# Altium PCB 2101 Version.PcbDoc
Units mil, origin at the board's own origin, x right, y up, seen from the top; angles counter-clockwise.
Board outline 2960 x 1860 mil, 2 copper layers (Top Layer, Bottom Layer); 50 components, 29 nets, 118 pads, 0 vias.
Unrouted connection lines stored in the file: 95.
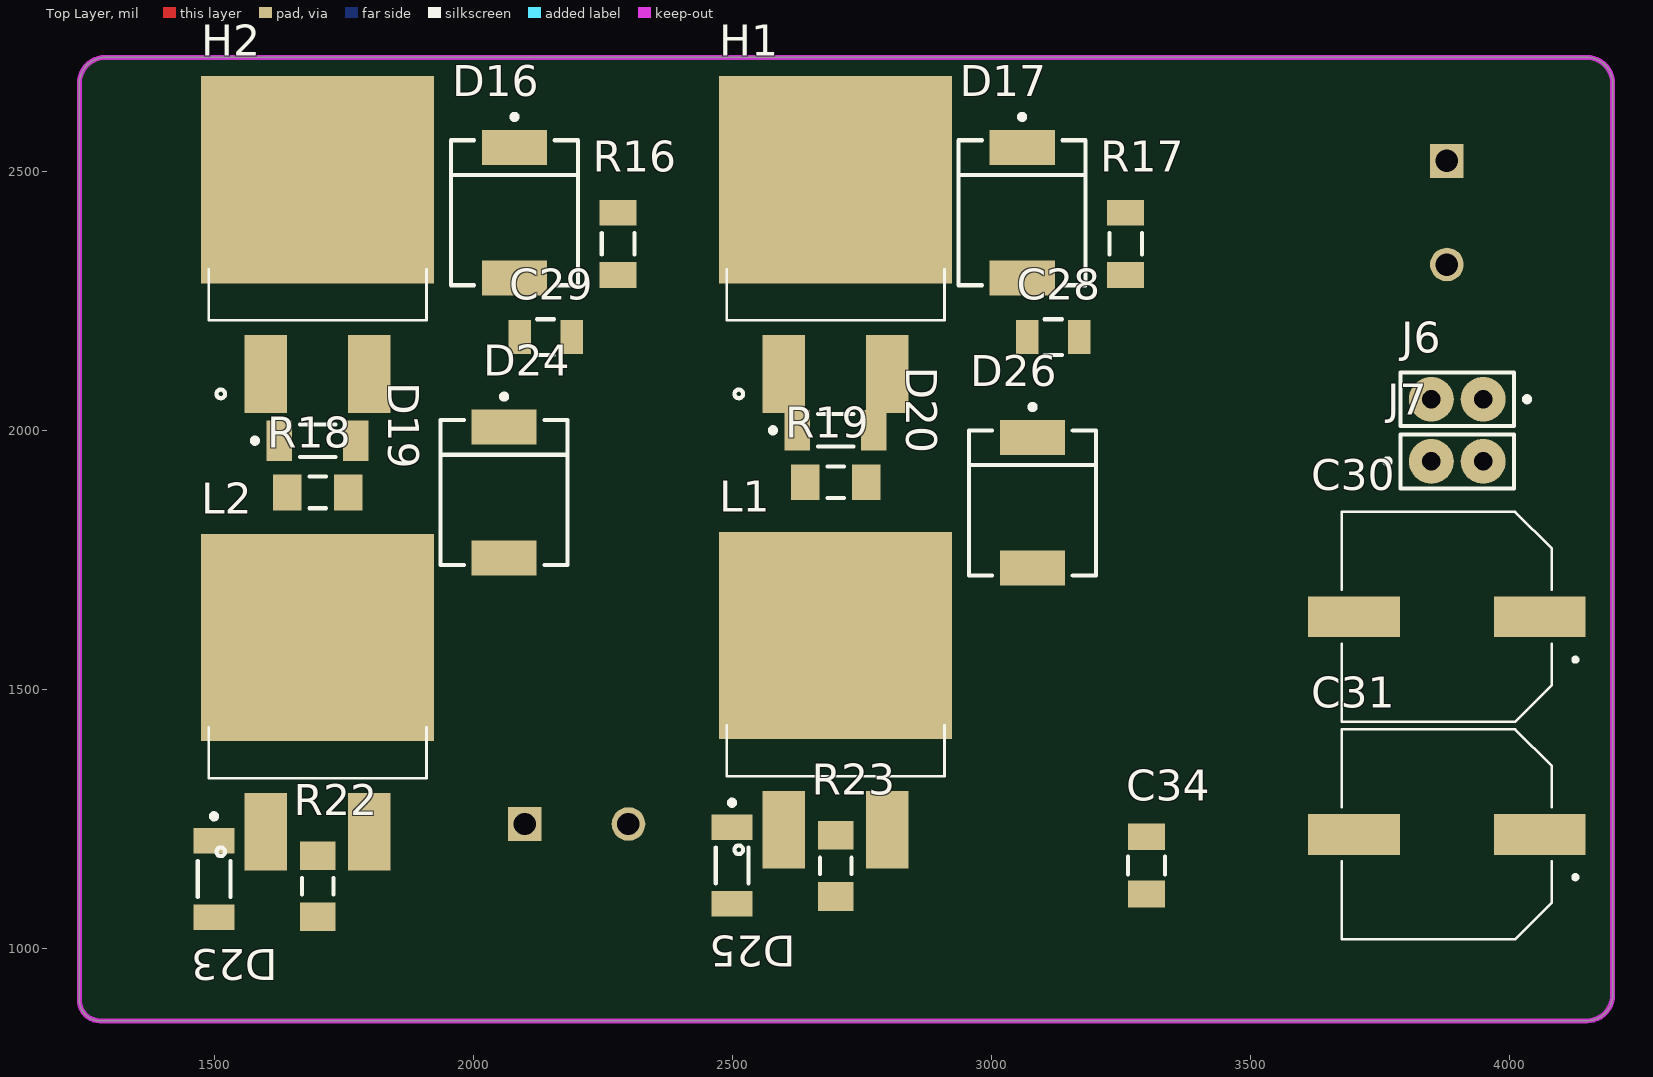
[diagram p0: Top Layer view]
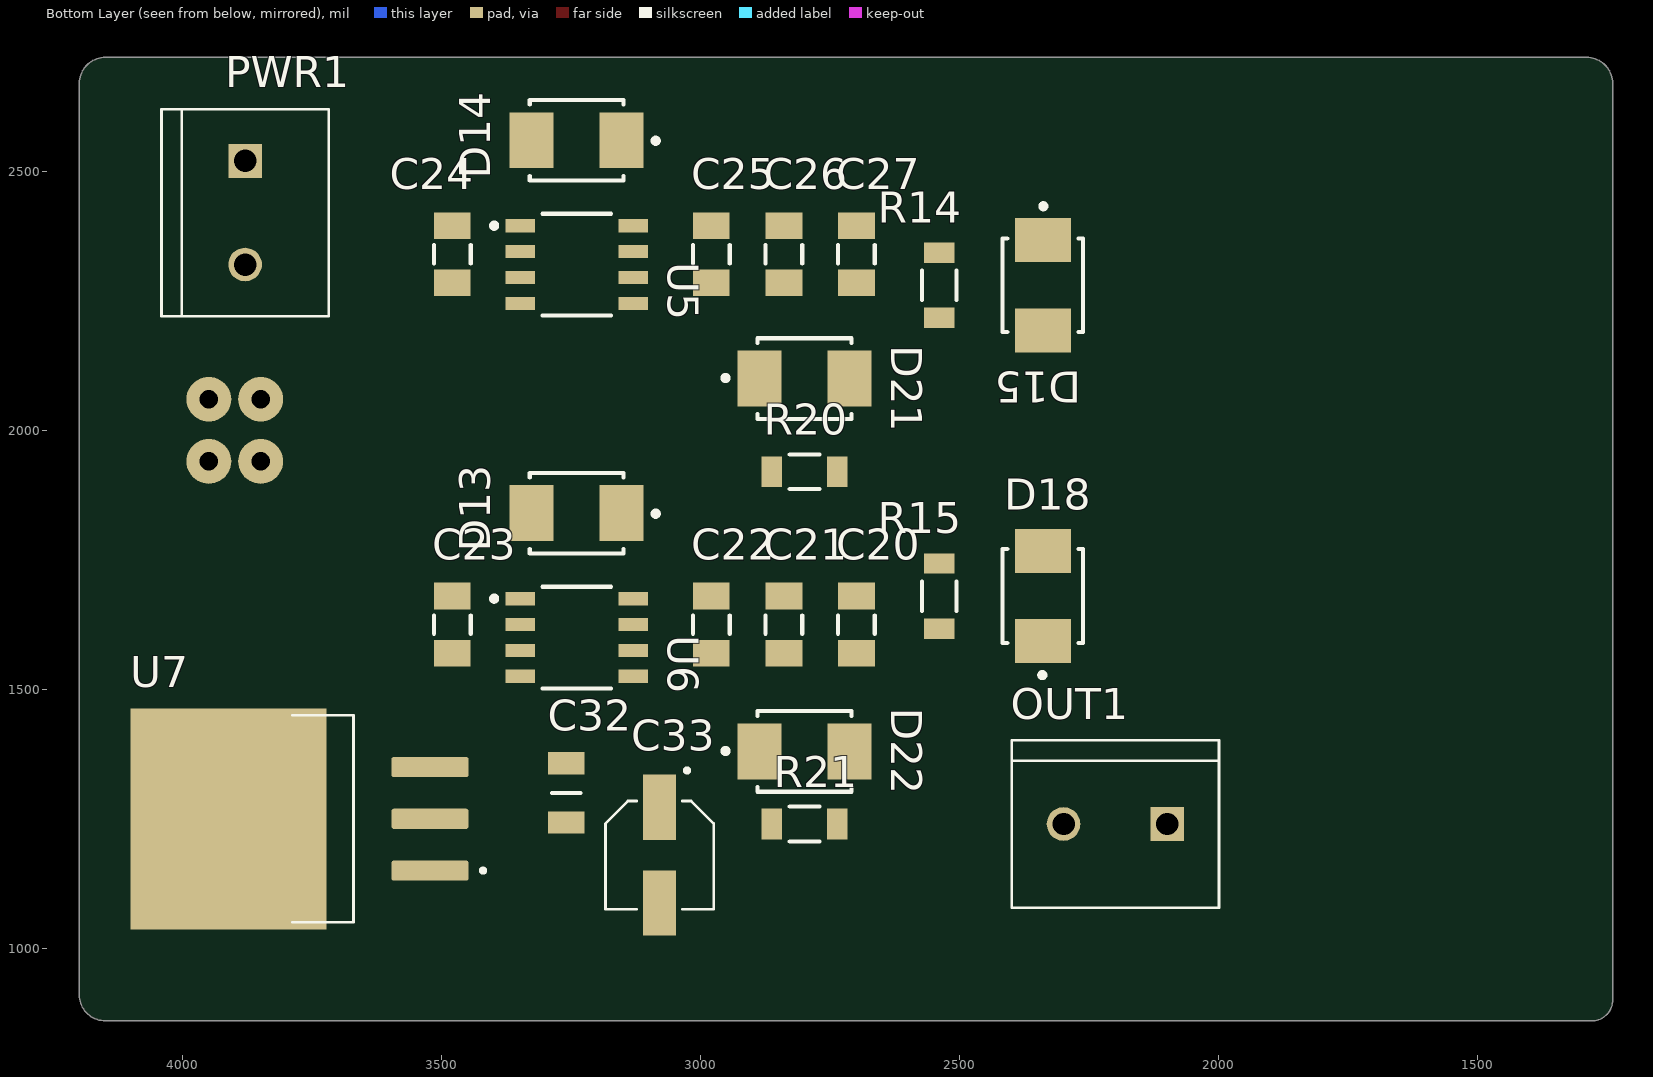
[diagram p1: Bottom Layer view, seen from below]

## Layer stack, top to bottom
Top Solder: solder mask 0.4, Solder Resist, Dk 3.5
Top Layer: signal copper 1.4
Dielectric 1: dielectric 12.6, FR-4, Dk 4.8
Bottom Layer: signal copper 1.4
Bottom Solder: solder mask 0.4, Solder Resist, Dk 3.5

## Board outline
1240,900 ccw(c1280,900) 1280,860 4150,860 ccw(c4150,910) 4200,910 4200,2670 ccw(c4150,2670) 4150,2720 1290,2720 ccw(c1290,2670) 1240,2670

## Design rules (kind name [scope] priority, off if disabled: settings)
Clearance [All] p1: gap=19 ignorepadtopadclearanceinfootprint=TRUE except(0: Arc-Hole Track-Hole SMDPad-Hole THPad-Hole Via-Hole Fill-Hole Poly-Hole Region-Hole Text-Hole)
ComponentClearance [All] p1: gap=10 collisioncheckmode=3 verticalgap=0 showdistances=FALSE
PolygonConnect [All] p1: connectstyle=Direct reliefconductorwidth=10 reliefentries=4 polygonreliefangle="90 Angle" airgapwidth=10
RoutingVias [All] p1: holewidth=28 width=50 viastyle="Through Hole" minholewidth=28 minwidth=50 maxholewidth=28 maxwidth=50
SolderMaskExpansion [All] p1: expansion=4 istentingtop=FALSE
Width [All] p1: maxlimit=200 minlimit=10 preferedwidth=20 minimp=50.000000 maximp=50.000000 favimp=50.000000
29 further rules are at their usual default settings.

## Components (designator, comment, footprint, x,y, rotation, side; value= is the part's Value field where it differs from the comment)
C20 "12061C474KAT2A" FP-1206-L_3_2_0_2-W_1_6_0-IPC_B 2700,1625 r270 bottom
C21 "12061C474KAT2A" FP-1206-L_3_2_0_2-W_1_6_0-IPC_B 2840,1625 r270 bottom
C22 "12061C474KAT2A" FP-1206-L_3_2_0_2-W_1_6_0-IPC_B 2980,1625 r270 bottom
C23 "12065C104KAT2A" FP-1206-L_3_2_0_2-W_1_6_0-IPC_B 3480,1625 r270 bottom
C24 "12065C104KAT2A" FP-1206-L_3_2_0_2-W_1_6_0-IPC_B 3480,2340 r270 bottom
C25 "12061C474KAT2A" FP-1206-L_3_2_0_2-W_1_6_0-IPC_B 2980,2340 r270 bottom
C26 "12061C474KAT2A" FP-1206-L_3_2_0_2-W_1_6_0-IPC_B 2840,2340 r270 bottom
C27 "12061C474KAT2A" FP-1206-L_3_2_0_2-W_1_6_0-IPC_B 2700,2340 r270 bottom
C28 "CL31C331JBCNNNC" FP-CL31-IPC_C 3120,2180 r180 top
C29 "CL31C331JBCNNNC" FP-CL31-IPC_C 2140,2180 r180 top
C30 "220uF" 220uF 3880,1640 r180 top
C31 "220uF" 220uF 3880,1220 r180 top
C32 "330nF" "1206 PACKAGE" 3260,1300 r90 bottom
C33 "22uF" 22uF-50V_CAP_EEEFN1H220UR 3080,1180 r270 bottom
C34 "12065C104KAT2A" FP-1206-L_3_2_0_2-W_1_6_0-IPC_B 3300,1160 r90 top
D13 "MURS120T3G" FP-403A-03-MFG 3240,1840 r0 bottom
D14 "MURS120T3G" FP-403A-03-MFG 3240,2560 r0 bottom
D15 "MURS120T3G" FP-403A-03-MFG 2340,2280 r270 bottom
D16 "SS34-E3/57T" FP-95402-MFG 2080,2420 r270 top
D17 "SS34-E3/57T" FP-95402-MFG 3060,2420 r270 top
D18 "MURS120T3G" FP-403A-03-MFG 2340,1680 r90 bottom
D19 "TZMC3V3-GS08" FP-6_560-5005_01-4-MFG 1700,1980 r0 top
D20 "TZMC3V3-GS08" FP-6_560-5005_01-4-MFG 2700,2000 r0 top
D21 "MURS120T3G" FP-403A-03-MFG 2800,2100 r180 bottom
D22 "MURS120T3G" FP-403A-03-MFG 2800,1380 r180 bottom
D23 "TZMC3V3-GS08" FP-6_560-5005_01-4-MFG 1500,1133.82 r270 top
D24 "SS34-E3/57T" FP-95402-MFG 2060,1880 r270 top
D25 "TZMC3V3-GS08" FP-6_560-5005_01-4-MFG 2500,1160 r270 top
D26 "SS34-E3/57T" FP-95402-MFG 3080,1860 r270 top
H1 "IRF3205S_PBF" 3205pbf 2700,2340 r0 top
H2 "IRF3205S_PBF" 3205pbf 1700,2340 r0 top
J6 "M20-9990246" FP-M20-9990246-MFG 3900,2060 r180 top
J7 "M20-9990246" FP-M20-9990246-MFG 3900,1940 r0 top
L1 "IRF3205S_PBF" 3205pbf 2700,1460 r0 top
L2 "IRF3205S_PBF" 3205pbf 1700,1456.1 r0 top
OUT1 "2_pin_male_header" 2_pin_male_header 2200,1240 r0 bottom
PWR1 "2_pin_male_header" 2_pin_male_header 3880,2420 r270 bottom
R14 "RC1206JR-0710RL" FP-RC1206-0_65-MFG 2540,2280 r270 bottom
R15 "RC1206JR-0710RL" FP-RC1206-0_65-MFG 2540,1680 r90 bottom
R16 "AC1206FR-0720RL" FP-AC1206-IPC_A 2280,2360 r270 top
R17 "AC1206FR-0720RL" FP-AC1206-IPC_A 3260,2360 r270 top
R18 "Resistor 1k +/-1% 1206 250 mW" RESC3116X70X50ML13T20 1700,1880 r0 top value=1k
R19 "Resistor 1k +/-1% 1206 250 mW" RESC3116X70X50ML13T20 2700,1900 r0 top value=1k
R20 "RC1206JR-0710RL" FP-RC1206-0_65-MFG 2800,1920 r180 bottom
R21 "RC1206JR-0710RL" FP-RC1206-0_65-MFG 2800,1240 r180 bottom
R22 "Resistor 1k +/-1% 1206 250 mW" RESC3116X70X50ML13T20 1700,1120 r270 top value=1k
R23 "Resistor 1k +/-1% 1206 250 mW" RESC3116X70X50ML13T20 2700,1159.06 r270 top value=1k
U5 "IR2101SPBF-BL" FP-PG-DSO-8-MFG 3240,2320 r180 bottom
U6 "IR2101SPBF-BL" FP-PG-DSO-8-MFG 3240,1600 r180 bottom
U7 "LM7812S/NOPB" lm7812 3800,1260 r90 bottom

## Footprints (in the part's own frame and the unit in brackets; to place one, negate y for a bottom-side part, rotate by r counter-clockwise, add the part's x,y. Pads: shape width x height; smd on the part's side, far side on the other; paste and mask are expansions set on the pad)
2_pin_male_header [mm] "TE_282837-2"
  rect 1.65x1.65 hole 1.1: 1(-2.54,0)
  round 1.65 hole 1.1: 2(2.54,0)
  silkscreen extent -5.08,-4.1 5.08,4.1, body extent -5.38,-4.14 5.38,4.06, height 9.79
22uF-50V_CAP_EEEFN1H220UR [mm] "22uF 50V electrolytic smd kondansator"
  rect 3.2x1.6 smd: 1(-2.35,0) 2(2.35,0)
  silkscreen extent -4.25,-2.65 2.65,2.65, body extent -3,-2.65 3,2.65, height 5.8
220uF [mm] "220uF_50V_smd_capacitor"
  rect 4.5x2 smd: 1(-4.55,0) 2(4.55,0)
  silkscreen extent -6.4,-5.15 5.15,5.15, body extent -5.85,-5.15 5.85,5.15, height 10.19
"1206 PACKAGE" [mm] "PACKAGE FOR RESISTOR AND CAPACITOR"
  rect 1.1x1.8 smd: 1(-1.45,0) 2(1.45,0)
  silkscreen extent 0,-0.7 0,0.7, body extent -1.42,-0.8 1.68,0.8, height 0.65
3205pbf [mm]
  rect 2.08x3.81 smd: 1(-2.54,-5.87) 3(2.54,-5.87)
  rect 11.43x10.16 smd: 2(0,3.655)
  silkscreen extent -5.34,-7.06 5.34,-0.74, body extent -5.08,-6.62 5.08,8.62, height 4.83
FP-6_560-5005_01-4-MFG [mm]
  rect 1.25x2 smd paste+0 mask+0: 1(-1.875,0) 2(1.875,0)
  silkscreen extent -3.2,-0.8 0.87,0.8, body extent -1.76,-0.8 1.74,0.8, height 1.59
FP-403A-03-MFG [mil]
  rect 85x107.99 smd paste+0 mask+0: 1(-87.01,0) 2(87.01,0)
  silkscreen extent -157,-78 91,78, body extent -107,-70 107,70, height 97
FP-1206-L_3_2_0_2-W_1_6_0-IPC_B [mil]
  rect 51.36x71.11 smd paste+0 mask+0: 1(-55.15,0) 2(55.15,0)
  silkscreen extent -18,-36 18,36, body extent -63,-31 63,31, height 70
FP-95402-MFG [mm]
  rect 1.72x3.2 smd paste+0 mask+0: 1(-3.205,0) 2(3.205,0)
  silkscreen extent -4.82,-3.11 3.55,3.11, body extent -4.17,-3.21 4.17,3.21, height 0.25
FP-AC1206-IPC_A [mil]
  rect 49.53x71.34 smd paste+0 mask+0: 1(-60.12,0) 2(60.12,0)
  silkscreen extent -21,-31 21,31, body extent -105,-55 105,55, height 10
FP-CL31-IPC_C [mil]
  rect 43.52x65.28 smd paste+0 mask+0: 1(-50.25,0) 2(50.25,0)
  silkscreen extent -17,-34 17,34, body extent -76,-38 76,38, height 10
FP-M20-9990246-MFG [mm]
  round 2.2 hole 0.9 mask+0.051: 1(-1.27,0) 2(1.27,0)
  silkscreen extent -3.55,-1.32 2.79,1.32, body extent -2.54,-1.27 2.54,1.27, height 8.99
FP-PG-DSO-8-MFG [mm]
  rect 1.45x0.65 smd paste+0 mask+0: 1(-2.775,1.905) 2(-2.775,0.635) 3(-2.775,-0.635) 4(-2.775,-1.905) 5(2.775,-1.905) 6(2.775,-0.635) 7(2.775,0.635) 8(2.775,1.905)
  silkscreen extent -4.17,-2.49 1.68,2.49, body extent -3,-2.45 3,2.45, height 1.75
FP-RC1206-0_65-MFG [mm]
  rect 1x1.5 smd paste+0 mask+0: 1(-1.6,0) 2(1.6,0)
  silkscreen extent -0.72,-0.85 0.72,0.85, body extent -1.6,-0.79 1.62,0.81, height 0.57
lm7812 [mm]
  rrect25% 0.99x3.79 smd: 1(-2.794,-7.035) 2(-0.254,-7.035) 3(2.286,-7.035)
  rect 10.84x9.62 smd paste-6: 4(-0.254,2.845)
  silkscreen extent -5.33,-9.73 4.83,-0.29, body extent -5.33,-7.43 4.83,6.93, height 4.75
RESC3116X70X50ML13T20 [mm] "Chip Resistor, 2-Leads, Body 3.25x1.65mm, IPC Low Density"
  rect 1.4x1.75 smd: 1(-1.5,0) 2(1.5,0)
  silkscreen extent -0.4,-0.77 0.4,0.77, body extent -1.63,-0.82 1.63,0.82, height 0.7

## Part data
C20 C27: library part CMP-000013-1, "1206 470 nF 100 V ±10 % Tolerance X7R Surface Mount Multilayer Ceramic Capacitor", Capacitance=0F
C21 C22 C25 C26: library part CMP-000013-1, "1206 470 nF 100 V ±10 % Tolerance X7R Surface Mount Multilayer Ceramic Capacitor", Capacitance=470nF
C23 C24 C34: library part CMP-001-00084-1, "Ceramic capacitor SMD-1206 100nF /50V X7R# K +-10%, AVX, RoHS, /4000 reel/", Capacitance=100nF
C28 C29: library part CMP-000014-1, "Cap Ceramic 330pF 50V C0G 5% Pad SMD 1206 125C T/R", Capacitance="330 pF"
C30 C31: "CAP ALUM 220UF 20% 50V SMD", Package="RADIAL-2 Panasonic", Availability="In Stock", Check_prices=https://www.snapeda.com/parts/EEEFP1H221AL/Panasonic/view-part/5797279/?ref=eda, MF=Panasonic, MP=EEEFP1H221AL, Price=None, SnapEDA_Link=https://www.snapeda.com/parts/EEEFP1H221AL/Panasonic/view-part/5797279/?ref=snap, Urun adi=EEEFP1H221AL
C32: "330nF 50V seramic capacitor 1206 package"
C33: "CAP ALUM 22UF 20% 50V SMD", Package="RADIAL-2 Panasonic", Availability="In Stock", Check_prices=https://www.snapeda.com/parts/EEE-FN1H220UR/Panasonic/view-part/6178088/?ref=eda, MF="Panasonic Electronic Components", MP=EEE-FN1H220UR, Price=None, Purchase-URL=https://pricing.snapeda.com/search/part/EEE-FN1H220UR/?ref=eda, SnapEDA_Link=https://www.snapeda.com/parts/EEE-FN1H220UR/Panasonic/view-part/6178088/?ref=snap, Urun kodu=EEEFN1H220UR
D13 D14 D15 D18 D21 D22: library part CMP-004-00033-1, "VR=200V IF=2A Trr=35ns"
D16 D17 D24 D26: library part CMP-000005-2, "DIODE SCHOTTKY 40V 3A DO214AB"
D19 D20 D23 D25: library part CMP-000009-1, "DIODE ZENER 3.3V 500MW SOD80"
H1 H2 L1 L2: "RoHS Compliant", Package="D2PAK Infineon", Availability=Unavailable, MF="Infineon Technologies", MP=IRF3205SPBF, Price=None, SnapEDA_Link=https://www.snapeda.com/parts/IRF3205SPBF/Infineon%20Technologies/view-part/576468/?ref=snap
J6 J7: library part CMP-002-00076-2, "2.54mm (0.1\") Pitch SIL Vertical PC Tail Pin Header, 6.1mm mating pin height, tin, 2 contacts"
OUT1 PWR1: "TERM BLOCK 5.08MM 2POS SIDE ENTY", Package=None, Availability=Unavailable, MP=282837-2, Price=None
R14 R15 R20 R21: library part CMP-000008-1, "Res General Purpose Thick Film 1206 10 Ohm 5% 1/4W ±200ppm/°C Molded SMD Paper T/R"
R16 R17: library part CMP-000010-1, "Res General Purpose Thick Film 1206 20 Ohm 1% 1/4W ±100ppm/°C Molded Paper T/R"
R18 R19 R22 R23: library part CMP-009-00011-5, "Chip Resistor, 1 KOhm, +/- 1%, 0.25 W, -55 to 155 degC, 1206 (3216 Metric)", Case/Package=1206, Max Operating Temperature=155°C, Min Operating Temperature=-55°C, Power=250mW, Tolerance=1%, Voltage Rating=200V, Mounting Technology=SM, Pins=2, RoHS Compliant=True
U5 U6: library part CMP-000015-1, "MOSFET DRVR 600V 0.36A 2-OUT Hi/Lo Side Non-Inv 8-Pin SOIC"
U7: "1.5-A, 30-V, linear voltage regulator 3-DDPAK/TO-263 0 to 125", Package="TO-263-3 Texas Instruments", Arrow_Electronics-Purchase-URL=https://snapeda.com/shop?store=Arrow+Electronics&id=559615, Availability=Unavailable, DigiKey-Purchase-URL=https://snapeda.com/shop?store=DigiKey&id=559615, MF="Texas Instruments", Mouser-Purchase-URL=https://snapeda.com/shop?store=Mouser&id=559615, MP=LM7812S/NOPB, Price=None, SnapEDA_Link=https://www.snapeda.com/parts/LM7812S/NOPB/Texas%20Instruments/view-part/559615/?ref=snap, Texas_Instruments-Purchase-URL=https://snapeda.com/shop?store=Texas+Instruments&id=559615

## Nets (pads, with @x,y where several pads share a name; then routed paths per layer and width w, separated by ;. In a path a pad name is that pad's centre, name@x,y a point inside that pad or via, vN(x,y) a via of type N, cw(c..) or ccw(c..) an arc to the next point about the centre after c; other vN are vias at no path point)
+5: 
+12: C23.1 C24.1 C32.2 C33.1 D13.2 D14.2 U5.1 U6.1 U7.3
BAT: 
D3: 
D9: 
D10: 
D11: 
GND: C23.2 C24.2 C30.2 C31.2 C32.1 C33.2 C34.2 D23.2 D24.2 D25.2 D26.2 L1.3 L2.3 PWR1.2 R22.2 R23.2 U5.4 U6.4 U7.2 U7.4
HG1: D15.2 D19.1 H2.1 R14.2 R18.1
HG2: D18.2 D20.1 H1.1 R15.2 R19.1
HIN1: J6.1 U5.2
HIN2: J7.1 U6.2
HO1: D15.1 R14.1 U5.7
HO2: D18.1 R15.1 U6.7
LG1: D21.2 D23.1 L2.1 R20.2 R22.1
LG2: D22.2 D25.1 L1.1 R21.2 R23.1
LIN1: J6.2 U5.3
LIN2: J7.2 U6.3
LO1: D21.1 R20.1 U5.5
LO2: D22.1 R21.1 U6.5
NetC28_1: C28.1 R17.2
NetC29_1: C29.1 R16.2
SNUB1: 
SNUB2: 
VB1: C25.1 C26.1 C27.1 D14.1 U5.8
VB2: C20.1 C21.1 C22.1 D13.1 U6.8
VCC: C30.1 C31.1 C34.1 D16.1 D17.1 H1.2 H2.2 PWR1.1 R16.1 R17.1 U7.1
VS1: C25.2 C26.2 C27.2 C29.2 D16.2 D19.2 D24.1 H2.3 L2.2 OUT1.1 R18.2 U5.6
VS2: C20.2 C21.2 C22.2 C28.2 D17.2 D20.2 D26.1 H1.3 L1.2 OUT1.2 R19.2 U6.6

## Keep-outs
Top Layer:
  lines w10: 1240,900 ccw(c1280,900) 1280,860 4140,860 4150,860 ccw(c4150,910) 4200,910 4200,1040 4200,2670 ccw(c4150,2670) 4150,2720 1290,2720 ccw(c1290,2670) 1240,2670 1240,1050 1240,900

## Other copper
Top Layer:
  text "MBK-MSK" at 2000,4100 h70
  text "AUTOBEE" at 1595,3075 h80
  text "2023" at 1730,2890 h50